# Altium PCB PCB2.PcbDoc
Units mm, origin at the board's own origin, x right, y up, seen from the top; angles counter-clockwise.
Board outline 37.72 x 66.93 mm, 2 copper layers (Top Layer, Bottom Layer); 28 components, 30 nets, 108 pads, 22 vias.
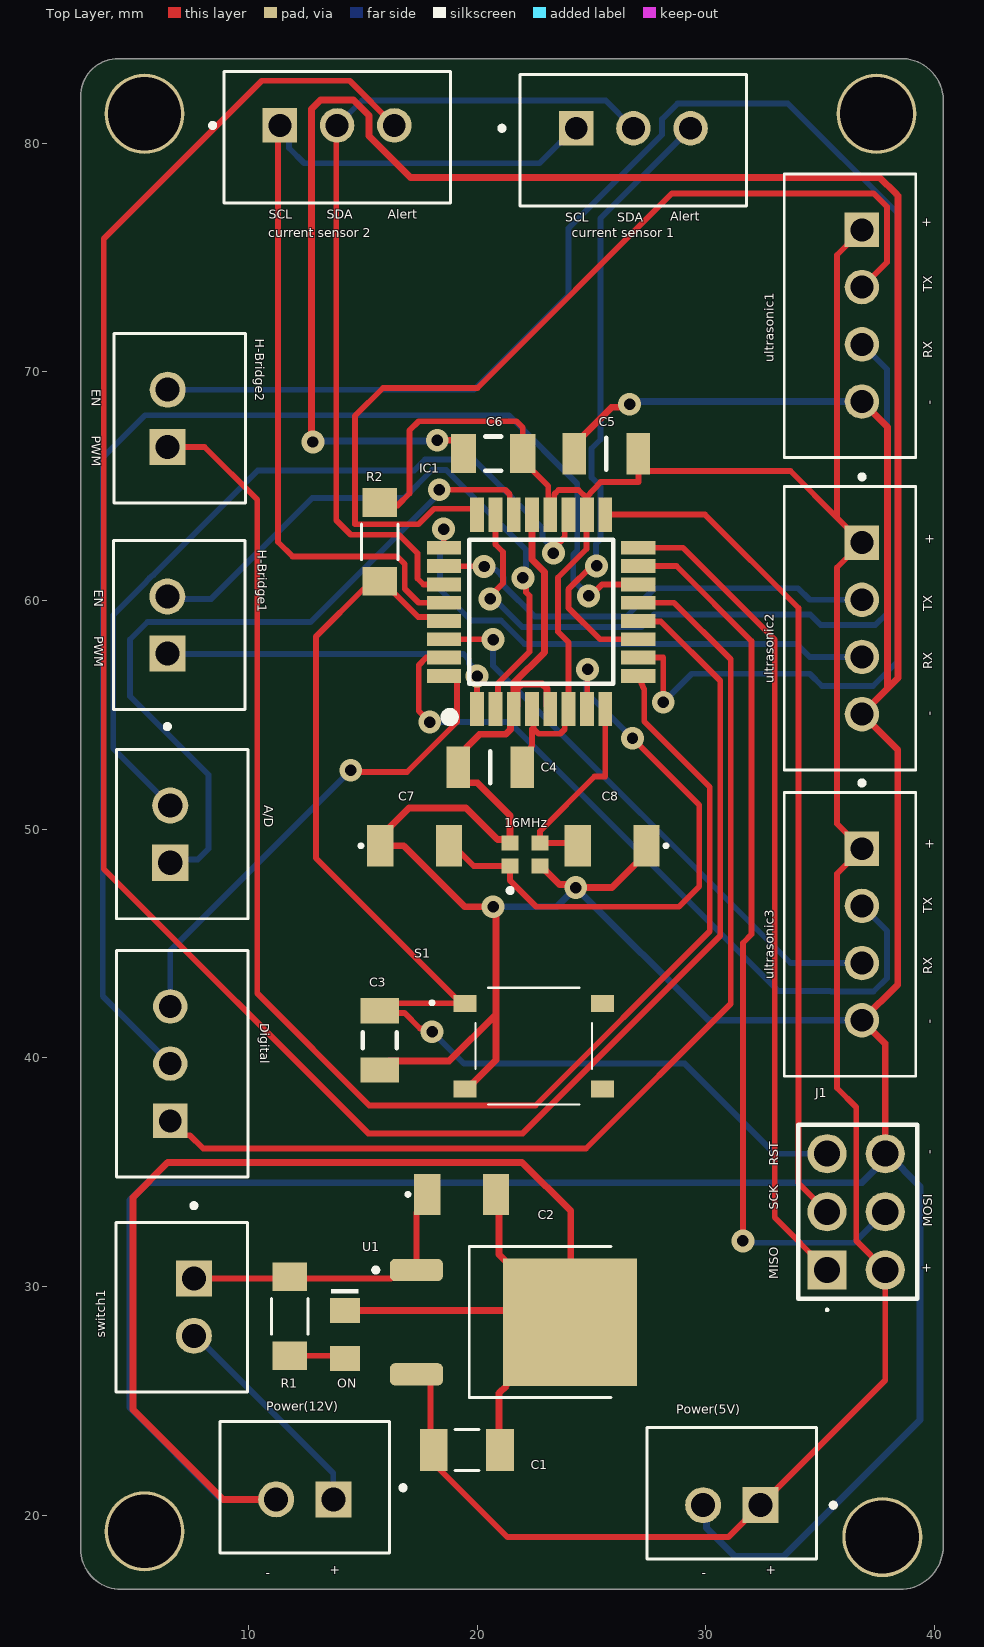
[diagram p0: Top Layer view]
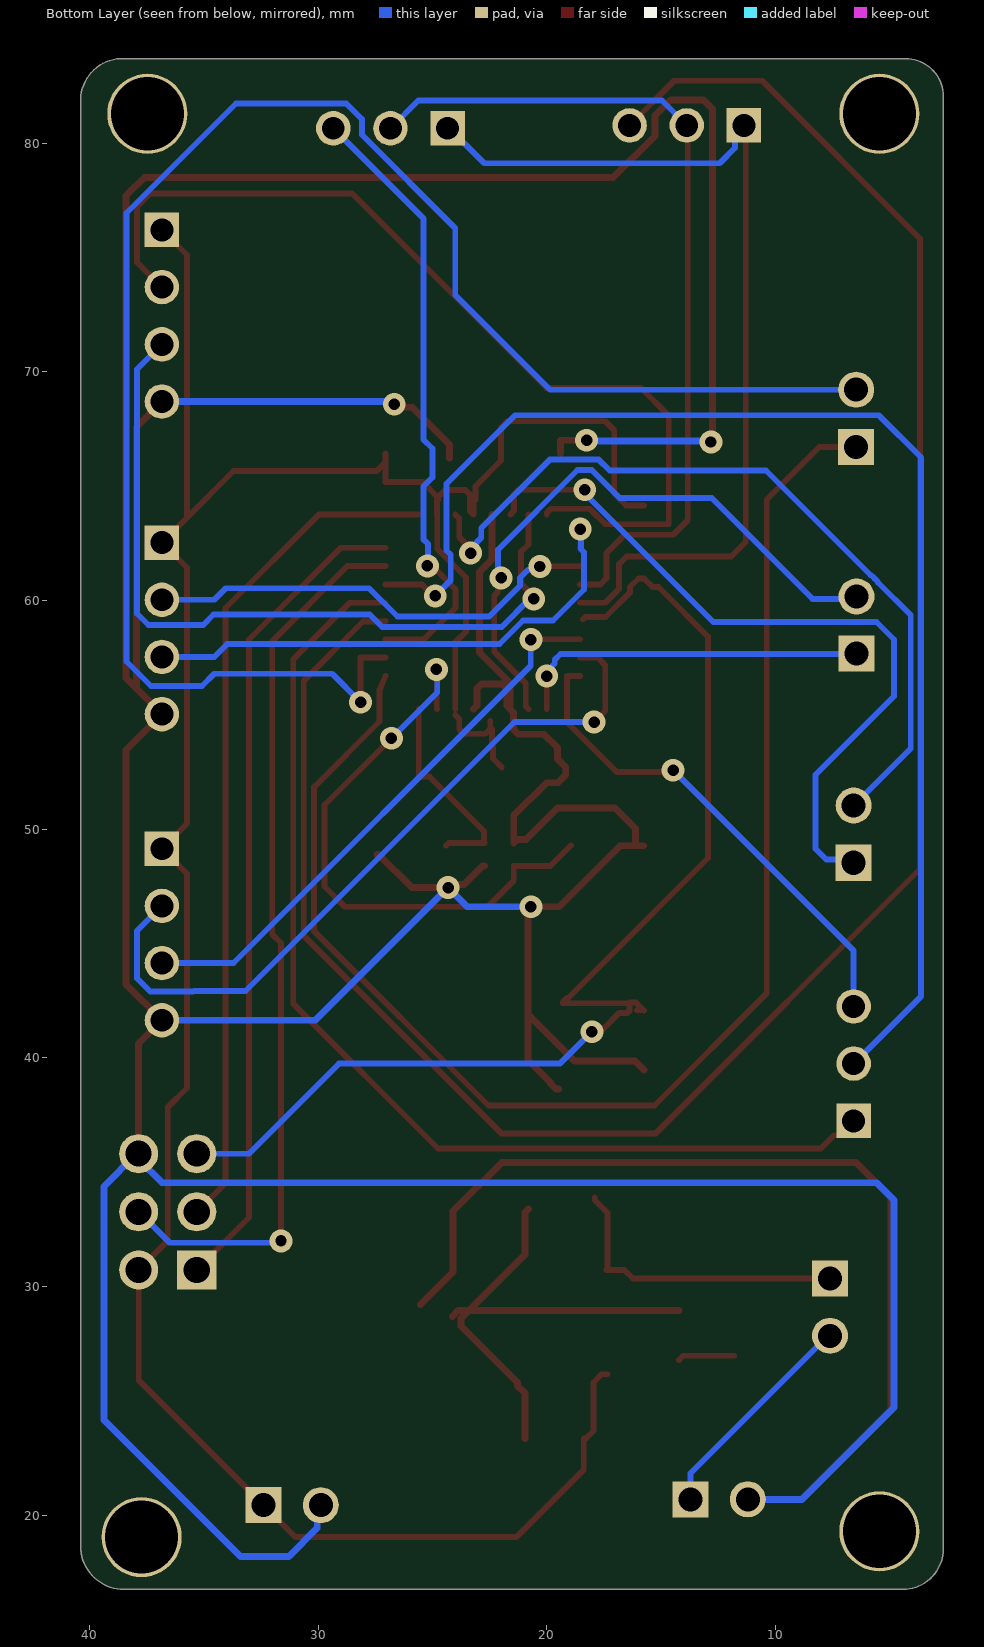
[diagram p1: Bottom Layer view, seen from below]
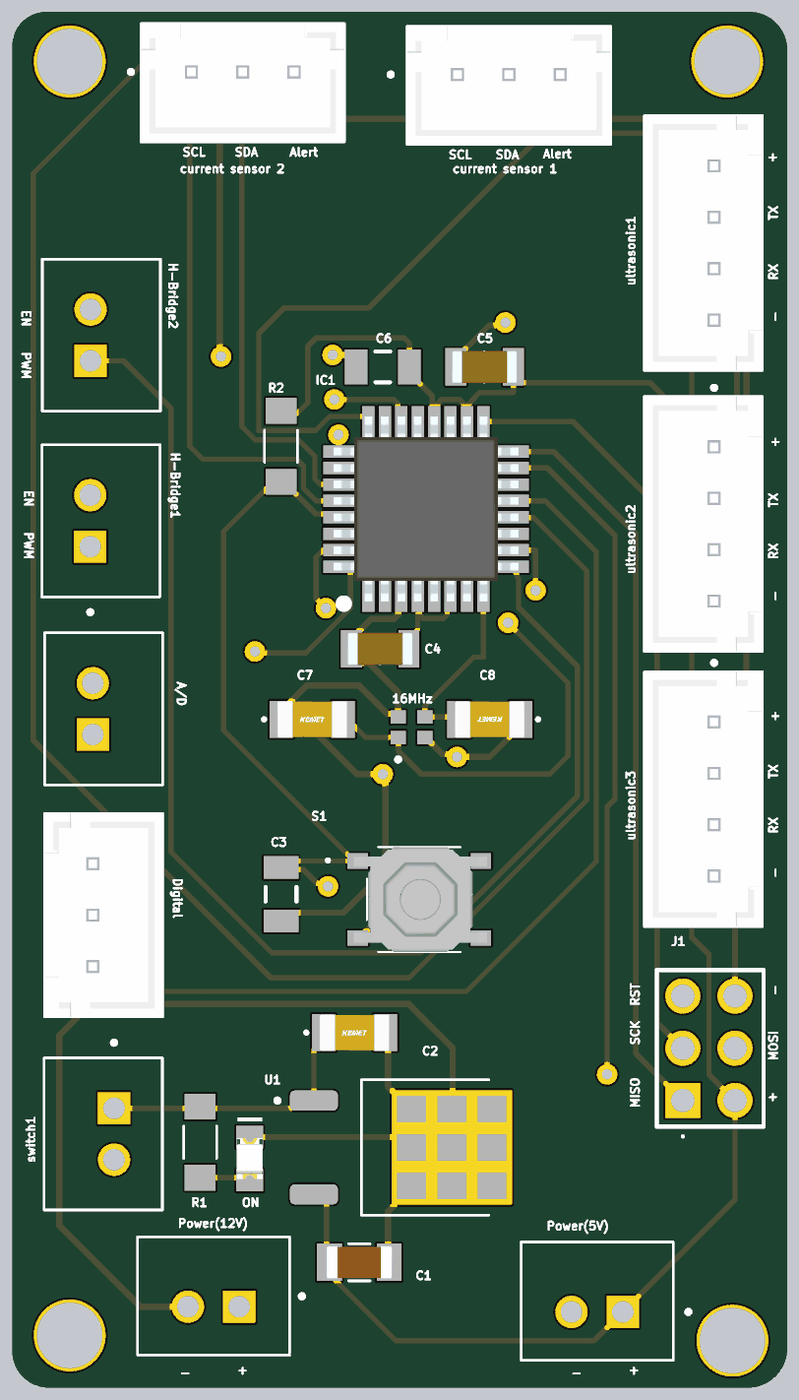
[diagram p2: 3D render of the assembled board from above, using the file's embedded part models]

## Layer stack, top to bottom
Top Solder: solder mask 0.0102, Solder Resist, Dk 3.5
Top Layer: signal copper 0.0356
Dielectric 1: dielectric 0.32, FR-4, Dk 4.8
Bottom Layer: signal copper 0.0356
Bottom Solder: solder mask 0.0102, Solder Resist, Dk 3.5

## Board outline
2.667,18.542 2.667,82.042 cw(c4.318,82.042) 4.318,83.693 38.481,83.693 cw(c38.544,81.851) 40.386,81.915 40.386,18.669 cw(c38.481,18.669) 38.481,16.764 4.445,16.764 cw(c4.445,18.542)

## Design rules (kind name [scope] priority, off if disabled: settings)
BoardOutlineClearance [All] p1: gap=0.2 ignorepadtopadclearanceinfootprint=FALSE except(0.4: Arc-SplitBarrior Arc-SplitContinuation Track-SplitBarrior Track-SplitContinuation SMDPad-SplitBarrior SMDPad-SplitContinuation THPad-SplitBarrior THPad-SplitContinuation Via-SplitBarrior Via-SplitContinuation Fill-SplitBarrior Fill-SplitContinuation Poly-SplitBarrior Poly-SplitContinuation Region-SplitBarrior Region-SplitContinuation Text-SplitBarrior Text-SplitContinuation)
Clearance "Clearance Bottom Layer" [OnLayer('Bottom Layer')] p1: gap=0.203 ignorepadtopadclearanceinfootprint=TRUE except(0.254: Arc-Text Track-Text SMDPad-Text THPad-Text Via-Text Fill-Text Poly-Text Region-Text Text-Text)
Clearance "Clearance Top Layer" [OnLayer('Top Layer')] p2: gap=0.203 ignorepadtopadclearanceinfootprint=TRUE except(0.254: Arc-Text Track-Text SMDPad-Text THPad-Text Via-Text Fill-Text Poly-Text Region-Text Text-Text)
Clearance [All] p3: gap=0.2 ignorepadtopadclearanceinfootprint=FALSE except(0.089: Arc-Arc Arc-Track Arc-SMDPad Track-Track Track-SMDPad SMDPad-SMDPad; 0.127: Arc-Via Track-Via SMDPad-Via THPad-Via Via-Via; 0.254: Arc-Text Track-Text SMDPad-Text THPad-Text Via-Text Fill-Text Poly-Text Region-Text Text-Text)
HoleSize [All] p1: absolutevalues=TRUE maxlimit=6.3 minlimit=0.2 maxpercent=80.000 minpercent=20.000
MinimumAnnularRing [All] p1: minimumring=0.076
MinimumSolderMaskSliver [All] p1: minsoldermaskwidth=0.1
PolygonConnect PolygonConnect_1 [All] p1: thpad.connectstyle=Relief thpad.reliefconductorwidth=0.508 thpad.reliefentries=4 thpad.polygonreliefangle="90 Angle" thpad.airgapwidth=0.254 smdpad.connectstyle=Relief smdpad.reliefconductorwidth=0.508 smdpad.reliefentries=4 smdpad.polygonreliefangle="90 Angle" smdpad.airgapwidth=0.254 via.connectstyle=Direct via.reliefconductorwidth=0.508 via.reliefentries=4 via.polygonreliefangle="90 Angle" via.airgapwidth=0.254
RoutingCorners [All] p1: cornerstyle=Round minsetback=2.54 maxsetback=2.54
RoutingVias [All] p1: holewidth=0.5 width=1 viastyle="Through Hole" minholewidth=0.2 minwidth=0.45 maxholewidth=1 maxwidth=2
SilkToSilkClearance [All] p1: silktosilkclearance=0.1
SilkToSolderMaskClearance [IsPad] p1: minsilkscreentomaskgap=0.1 clearancetoexposedcopper=TRUE
SolderMaskExpansion [All] p1: expansion=0.102 istentingtop=FALSE
Width [All] p1: maxlimit=2.54 minlimit=0.089 preferedwidth=0.381
25 further rules are at their usual default settings.

## Classes and differential pairs
component class Inputs: A/D "current sensor 1" "current sensor 2" Digital H-Bridge1 H-Bridge2 Power(5V) Power(12V) switch1 ultrasonic1 ultrasonic2 ultrasonic3
component class PowerSupply: C2 ON R1 U1
component class Main: 16MHz C3 C4 C5 C6 C7 C8 IC1 J1 R2 S1

## Components (designator, comment, footprint, x,y, rotation, side; value= is the part's Value field where it differs from the comment)
16MHz "ABM11-16.000MHz-12-N1G-T" XTAL_ABM11-16.000MHz-12-N1G-T 22.098,48.895 r90 top
A/D "B2B-XH-A" JST_B2B-XH-A 7.112,49.784 r270 top
C1 "GRM31C5C2A104JA01L" CAPC3216X180N 19.558,22.86 r0 top
C2 "C1206C334K1RECAUTO" C1206 19.328,34.036 r0 top
C3 "1206GC102KAT1A" AVX-1206-2_L 15.748,40.767 r90 top
C4 "10nF" CAPC3216X94N 20.574,52.705 r0 top
C5 "10nF" CAPC3216X94N 25.654,66.421 r0 top
C6 "1206GC102KAT1A" AVX-1206-2_L 20.701,66.421 r0 top
C7 "C1206C220JGGACTU (22pF)" C1206 17.272,49.276 r0 top
C8 "C1206C220JGGACTU (22pF)" C1206 25.908,49.276 r180 top
"current sensor 1" "B3B-XH-A(LF)(SN)" JST_B3B-XH-A(LF)(SN) 26.837,80.12 r180 top
"current sensor 2" "B3B-XH-A(LF)(SN)" JST_B3B-XH-A(LF)(SN) 13.883,80.247 r180 top
Digital "B3B-XH-A(LF)(SN)" JST_B3B-XH-A(LF)(SN) 7.112,39.751 r270 top
H-Bridge1 "B2B-XH-A" JST_B2B-XH-A 6.985,58.928 r270 top
H-Bridge2 "B2B-XH-A" JST_B2B-XH-A 7.002,67.965 r270 top
IC1 "ATMEGA328P-AU" QFP80P900X900X120-32N 22.803,59.504 r90 top
J1 "87911-0611" 879110611 35.306,30.734 r90 top
ON "150080SS75000" WL-SMCW_0805_150080xx75000 14.224,27.906 r270 top
Power(5V) "B2B-XH-A" JST_B2B-XH-A 31.135,20.972 r0 top (schematic designator Power(1)
Power(12V) "B2B-XH-A" JST_B2B-XH-A 12.466,21.226 r0 top (schematic designator Power1)
R1 "ERA8AEB103V" RES_ERA8AEB103V 11.811,28.702 r90 top
R2 "ERA8AEB103V" RES_ERA8AEB103V 15.748,62.56 r90 top
S1 "TS-1187A-B-A-B" TS1187ABAB 22.479,40.513 r0 top
switch1 "B2B-XH-A" JST_B2B-XH-A 7.095,29.103 r90 top
U1 "L78M05ACDT-TR" DPAK228P972X240-4N 21.59,28.448 r270 top
ultrasonic1 "B4B-XH-A(LF)(SN)" JST_B4B-XH-A(LF)(SN) 36.305,72.45 r90 top
ultrasonic2 "B4B-XH-A(LF)(SN)" JST_B4B-XH-A(LF)(SN) 36.305,58.781 r90 top
ultrasonic3 "B4B-XH-A(LF)(SN)" JST_B4B-XH-A(LF)(SN) 36.305,45.399 r90 top

## Footprints (in the part's own frame and the unit in brackets; to place one, negate y for a bottom-side part, rotate by r counter-clockwise, add the part's x,y. Pads: shape width x height; smd on the part's side, far side on the other; paste and mask are expansions set on the pad)
879110611 [mm]
  rect 1.71x1.71 hole 1.14: 1(0,0)
  round 1.71 hole 1.14: 2(0,-2.54) 3(2.54,0) 4(2.54,-2.54) 5(5.08,0) 6(5.08,-2.54)
  silkscreen extent -1.8,-3.94 6.35,1.27, body extent -1.4,-3.56 6.22,1.01, height 0.25
AVX-1206-2_L [mm] "SMD, 2-Leads, Body 3.4x1.8mm, IPC High Density"
  rect 1.1x1.7 smd: 1(-1.3,0) 2(1.3,0)
  silkscreen extent -0.35,-0.75 0.35,0.75, body extent -1.7,-0.9 1.7,0.9, height 1.52
C1206 [mm]
  rect 1.15x1.8 smd: 1(-1.5,0) 2(1.5,0)
  silkscreen extent -2.4,-0.05 -2.3,0.05, body extent -1.7,-0.9 1.7,0.9, height 1.1
CAPC3216X94N [mm]
  rect 1.02x1.82 smd: 1(-1.4,0) 2(1.4,0)
  silkscreen extent 0,-0.7 0,0.7, body extent -1.6,-0.8 1.6,0.8, height 0.94
CAPC3216X180N [mm]
  rect 1.21x1.82 smd: 1(-1.45,0) 2(1.45,0)
  silkscreen extent -0.52,-0.9 0.52,0.9, body extent -1.6,-0.8 1.6,0.8, height 1.9
DPAK228P972X240-4N [mm]
  rrect50% 0.98x2.33 smd: 1(-2.28,-4.24) 3(2.28,-4.24)
  rect 5.57x5.86 smd paste-4: 2(0,2.47)
  silkscreen extent -3.3,-6.12 3.3,4.27
JST_B2B-XH-A [mm]
  rect 1.575x1.575 / inner round 1.575 / far side rect 1.575x1.575 hole 1.05: 1(1.25,-0.525)
  round 1.575 hole 1.05: 2(-1.25,-0.525)
  silkscreen extent -3.7,-2.88 3.7,2.87
JST_B3B-XH-A(LF)(SN) [mm]
  rect 1.508x1.508 / inner round 1.508 / far side rect 1.508x1.508 hole 1: 1(2.5,-0.525)
  round 1.508 hole 1: 2(0,-0.525) 3(-2.5,-0.525)
  silkscreen extent -4.95,-2.88 5.85,2.87, body extent -4.95,-2.88 4.95,2.88, height 7
JST_B4B-XH-A(LF)(SN) [mm]
  rect 1.508x1.508 / inner round 1.508 / far side rect 1.508x1.508 hole 1: 1(3.75,-0.525)
  round 1.508 hole 1: 2(1.25,-0.525) 3(-1.25,-0.525) 4(-3.75,-0.525)
  silkscreen extent -6.2,-2.88 6.2,2.87, body extent -6.2,-2.88 6.2,2.88, height 7
QFP80P900X900X120-32N [mm]
  rect 1.5x0.6 smd: 1(-4.25,2.8) 2(-4.25,2) 3(-4.25,1.2) 4(-4.25,0.4) 5(-4.25,-0.4) 6(-4.25,-1.2) 7(-4.25,-2) 8(-4.25,-2.8) 17(4.25,-2.8) 18(4.25,-2) 19(4.25,-1.2) 20(4.25,-0.4) 21(4.25,0.4) 22(4.25,1.2) 23(4.25,2) 24(4.25,2.8)
  rect 0.6x1.5 smd: 9(-2.8,-4.25) 10(-2,-4.25) 11(-1.2,-4.25) 12(-0.4,-4.25) 13(0.4,-4.25) 14(1.2,-4.25) 15(2,-4.25) 16(2.8,-4.25) 25(2.8,4.25) 26(2,4.25) 27(1.2,4.25) 28(0.4,4.25) 29(-0.4,4.25) 30(-1.2,4.25) 31(-2,4.25) 32(-2.8,4.25)
  silkscreen extent -4.8,-3.15 3.15,4.2, body extent -4.5,-4.5 4.5,4.5, height 1.2
RES_ERA8AEB103V [mm]
  rect 1.25x1.5 smd: 1(-1.725,0) 2(1.725,0)
  silkscreen extent -0.78,-0.8 0.78,0.8
TS1187ABAB [mm]
  rect 1x0.75 smd: A1(-3,1.875) B1(3,1.875) C1(-3,-1.875) D1(3,-1.875)
  silkscreen extent -4.5,-2.55 2.55,2.55, body extent -3.2,-2.55 3.3,2.55, height 1.5
WL-SMCW_0805_150080xx75000 [mm] "SMD Mono-color Chip LED, body 2.0x1.25mm"
  rect 1.1x1.3 smd: 1(-1.05,0) 2(1.05,0)
  silkscreen extent -2,-0.6 -1.8,0.6, body extent -1,-0.63 1,0.62, height 0.7
XTAL_ABM11-16.000MHz-12-N1G-T [mm]
  rect 0.65x0.75 smd: 1(-0.5,0.65) 2(-0.5,-0.65) 3(0.5,-0.65) 4(0.5,0.65)
  silkscreen extent -1.67,0.55 -1.48,0.75

## Part data
16MHz A/D H-Bridge1 H-Bridge2 Power(5V) Power(12V) R1 R2 switch1: Package=None, Availability=Unavailable, Price=None
  16MHz: MF="{'manufacturer': u'Abracon LLC'}", MP=ABM11-16.000MHz-12-N1G-T
  A/D H-Bridge1 H-Bridge2 Power(5V) Power(12V) switch1: MF="{'manufacturer': u'JST Sales America Inc.'}", MP=B2B-XH-A
  R1 R2: MP=ERA8AEB103V
C1: "0.1 ÂµF Â±5% 100V Ceramic Capacitor C0G, NP0 1206 (3216 Metric)", Package="1206 Murata", Check_prices=https://www.snapeda.com/parts/GRM31C5C2A104JA01L/Murata+Electronics+North+America/view-part/?ref=eda, MF="Murata Electronics", MP=GRM31C5C2A104JA01L, SnapEDA_Link=https://www.snapeda.com/parts/GRM31C5C2A104JA01L/Murata+Electronics+North+America/view-part/?ref=snap
C2: "Capacitor", Manufacturer_Name=KEMET, Mouser Part Number=80-C1206C334K1RECAUT, Arrow Part Number=C1206C334K1RECAUTO, Arrow Price/Stock=https://www.arrow.com/en/products/c1206c334k1recauto/kemet-corporation, Datasheet Link=https://content.kemet.com/datasheets/KEM_C1090_X7R_ESD.pdf, Manufacturer_Part_Number=C1206C334K1RECAUTO, Mouser Price/Stock=https://www.mouser.co.uk/ProductDetail/KEMET/C1206C334K1RECAUTO?qs=MLItCLRbWsx8dVF2h1wzKg%3D%3D
C3 C6: library part CMP-2000-05468-1, "Chip Capacitor, 1 nF, +/- 10%, -55 to 125 degC, 1206 (3216 Metric), RoHS, Tape and Reel", Capacitance=100nF, Case Size/Dimension=1206, Dielectric=X7R, Manufacturer=AVX, Package Description="2-Pin SMD, Body 3.4 x 1.8 mm", Rated Voltage=2000V, Tolerance=10%, Tolerance (%)=±10%, Datasheet URL=https://datasheet.ciiva.com/11787/0900766b80ed4c37-11787781.pdf, Datasheet Version=11/2010, Manufacturer URL=http://www.avx.com/, Mounting Technology=SurfaceMount, Package Reference=1206, PartNumber=1206GC102KAT1A, Voltage Rating DC=2000V
C4 C5: library part KAM31BR81H103KT, "Capacitor", Manufacturer_Name="Kyocera AVX", Mouser Part Number=581-KAM31BR81H103KT, Datasheet Link=https://datasheets.kyocera-avx.com/AutoMLCCKAM.pdf, Height=0.94mm, Manufacturer_Part_Number=KAM31BR81H103KT, Mouser Price/Stock=https://www.mouser.co.uk/ProductDetail/KYOCERA-AVX/KAM31BR81H103KT?qs=Jm2GQyTW%2FbjzijSUJGW%2FJA%3D%3D
C7 C8: library part C1206C220JGGACTU, "Capacitor", Manufacturer_Name=KEMET, Mouser Part Number=80-C1206C220JGG, Datasheet Link=https://content.kemet.com/datasheets/KEM_C1009_C0G_HV_SMD.pdf, Manufacturer_Part_Number=C1206C220JGGACTU, Mouser Price/Stock=https://www.mouser.co.uk/ProductDetail/KEMET/C1206C220JGGACTU?qs=bISZhnDGhxtrVzrFMq60vg%3D%3D
"current sensor 1" "current sensor 2" Digital: "Connector Header Through Hole 3 position 0.098 (2.50mm)", Package=None, Check_prices=https://www.snapeda.com/parts/B3B-XH-A(LF)(SN)/JST+Sales+America+Inc./view-part/?ref=eda, MF="JST Sales", MP=B3B-XH-A(LF)(SN), SnapEDA_Link=https://www.snapeda.com/parts/B3B-XH-A(LF)(SN)/JST+Sales+America+Inc./view-part/?ref=snap
IC1: "Integrated Circuit", Manufacturer_Name=Microchip, Mouser Part Number=556-ATMEGA328P-AU, Arrow Part Number=ATMEGA328P-AU, Arrow Price/Stock=https://www.arrow.com/en/products/atmega328p-au/microchip-technology?region=europe, Datasheet Link=https://componentsearchengine.com/Datasheets/2/ATMEGA328P-AU.pdf, Height=1.2mm, Manufacturer_Part_Number=ATMEGA328P-AU, Mouser Price/Stock=https://www.mouser.co.uk/ProductDetail/Microchip-Technology/ATMEGA328P-AU?qs=K8BHR703ZXiCmmgp6%2FGNmQ%3D%3D
J1: "Connector", Manufacturer_Name=Molex, Mouser Part Number=538-87911-0611, Datasheet Link=https://www.molex.com/content/dam/molex/molex-dot-com/products/automated/en-us/salesdrawingpdf/879/87911/879110611_sd.pdf, Height=5.18mm, Manufacturer_Part_Number=87911-0611, Mouser Price/Stock=https://www.mouser.co.uk/ProductDetail/Molex/87911-0611?qs=vTUKd8r8%252BfEYOBWrgoJ4qQ%3D%3D
ON: library part CMP-1426-00010-3, Case Code (Imperial)=0805, Case Code (Metric)=2012, Color=Red, Forward Current=100mA, Forward Voltage=1.9V, Max Junction Temperature (Tj)=95°C, Max Operating Temperature=85°C, Max Reverse Voltage (DC)=5V, Min Operating Temperature=-40°C, Power Dissipation=72mW, Test Current=20mA, Case/Package=0805, Dominant Wavelength=630nm, Height=700µm, Length=2mm, Lens Style="Clear, Rectangular", Luminous Intensity=60mcd, Mount="Surface Mount", NexarPartId=29717782, Packaging="Tape and Reel", Peak Wavelength=645nm, REACH SVHC=Unknown, Reverse Voltage=5V, RoHS=Compliant, Viewing Angle=140°, Wavelength=630nm, Width=1.25mm
S1: "Switch", Manufacturer_Name="XKB Connectivity", Datasheet Link=http://www.helloxkb.com/public/images/pdf/TS-1187A-X-X-X.pdf, Height=4.05mm, Manufacturer_Part_Number=TS-1187A-B-A-B
U1: "Linear Voltage Regulator IC 1 Output 500mA DPAK", Package="TO-252-3 STMicroelectronics", Availability=Unavailable, MF=STMicroelectronics, MP=L78M05ACDT-TR, Price=None, SnapEDA_Link=https://www.snapeda.com/parts/L78M05ACDT-TR/STMicroelectronics/view-part/274303/?ref=snap
ultrasonic1 ultrasonic2 ultrasonic3: "Connector Header Through Hole 4 position 0.098 (2.50mm)", Package=None, Check_prices=https://www.snapeda.com/parts/B4B-XH-A(LF)(SN)/JST+Sales+America+Inc./view-part/?ref=eda, MF="JST Sales", MP=B4B-XH-A(LF)(SN), SnapEDA_Link=https://www.snapeda.com/parts/B4B-XH-A(LF)(SN)/JST+Sales+America+Inc./view-part/?ref=snap

## Free pads (board coordinates)
  round 3.5 hole 3.2: 7(5.461,19.304) 7(5.461,81.28) 7(37.465,81.28) 7(37.719,19.05)

## Via types
v1: diameter 1, hole 0.5, Top Layer to Bottom Layer, 22 vias

## Nets (pads, with @x,y where several pads share a name; then routed paths per layer and width w, separated by ;. In a path a pad name is that pad's centre, name@x,y a point inside that pad or via, vN(x,y) a via of type N, cw(c..) or ccw(c..) an arc to the next point about the centre after c; other vN are vias at no path point)
+5: C1.1 C4.2 C5.2 C6.2 IC1.4 IC1.6 IC1.18 IC1.20 J1.2 Power(5V).1 R2.2 U1.3 ultrasonic1.1 ultrasonic2.1 ultrasonic3.1 | length 125.8
  Top Layer w0.254: R2.2@15.748,64.16 16.535,64.16 17.052,64.677 17.052,67.439 17.448,67.835 21.73,67.835 22.001,67.564 C6.2 22.001,66.121 23.114,65.008 IC1.20@23.114,64.389 ; U1.3 17.608,26.168 17.962,25.814 17.962,23.694 C1.1@18.288,23.368 ; C1.1@18.385,23.368 18.385,22.001 21.336,19.05 30.988,19.05 32.385,20.447 ; C4.2 22.357,53.088 22.357,53.591 22.403,53.637 22.403,54.378 ; IC1.4@22.479,54.737 22.479,54.378 22.683,54.174 23.64,54.174 23.833,54.367 23.833,54.821 IC1.6@24.003,54.991 ; IC1.20@23.203,64.389 IC1.20 23.373,63.924 23.373,64.641 23.566,64.834 24.44,64.834 24.765,64.509 IC1.18@24.765,64.389 ; IC1.6 24.003,58.17 23.536,58.636 23.536,61.001 24.789,62.254 24.789,63.74 IC1.18 IC1.18@24.803,64.389 ; 24.803,64.516 25.4,65.176 27.054,65.176 C5.2@27.054,66.042 ; C5.2 C5.2@27.054,66.042 ; 32.405,20.464 37.846,25.905 J1.2 36.576,32.004 36.576,37.846 35.738,38.684 35.738,48.057 ultrasonic3.1 35.738,50.241 35.738,61.439 ultrasonic2.1 35.738,63.623 ; ultrasonic1.1 35.738,75.108 35.738,63.623 ; C5.2@27.054,66.042 27.437,65.659 33.702,65.659 35.738,63.623
GND: 16MHz.2 16MHz.4 C1.2 C2.2 C3.1 C4.1 C5.1 C6.1 C7.1 C8.1 IC1.3 IC1.5 IC1.21 J1.6 ON.1 Power(5V).2 Power(12V).2 S1.C1 U1.2 ultrasonic1.4 ultrasonic2.4 ultrasonic3.4 | length 336.6
  Top Layer w0.3: 11.216,20.701 8.89,20.701 4.953,24.638 4.953,33.909 6.477,35.433 21.971,35.433 24.1,33.304 24.1,30.637 U1.2@25.527,29.21 ; v1(12.827,66.929) 12.765,66.991 12.765,81.485 13.159,81.879 14.597,81.879 15.276,81.2 15.276,80.313 17.099,78.49 37.591,78.49 38.314,77.786 cw(c38.105,77.571) 38.317,77.784 38.405,77.696 38.405,56.606 37.948,56.149 ; ON.1 U1.2@23.407,28.956 ; C3.1 16.148,39.867 18.785,39.867 20.828,41.91 ; C7.1 C7.1@16.129,49.276 ; v1(18.263,67.005) 19.401,67.005 C6.1 ; S1.C1 19.604,38.638 19.829,38.863 19.829,38.909 20.828,39.908 20.828,41.91 ; C2.2@20.804,33.401 20.955,33.25 20.955,31.408 U1.2@23.407,28.956 ; C1.2@20.955,23.368 20.955,25.343 21.28,25.668 21.28,25.813 23.749,28.282 23.749,28.614 U1.2@23.407,28.956 ; IC1.21 22.403,61.797 22.951,61.248 22.951,57.737 21.603,56.389 IC1.3 ; 16MHz.2@22.733,48.387 22.806,48.387 23.612,47.581 24.182,47.581 v1(24.316,47.447) 25.904,47.447 27.352,48.895 C8.1@27.432,48.895 ; IC1.5 23.056,55.401 23.056,56.15 22.849,56.357 21.957,56.357 21.75,56.15 21.75,55.401 IC1.3 ; U1.2@24.13,28.702 23.876,28.956 U1.2@23.407,28.956 ; C5.1@24.254,66.218 C5.1 24.254,66.821 25.879,68.446 26.536,68.446 v1(26.67,68.58) ; ultrasonic1.4 37.948,67.582 37.948,56.149 ; J1.6 37.846,40.633 ultrasonic3.4 38.394,43.213 38.394,53.467 ultrasonic2.4 37.948,56.149 ; C7.1@16.129,49.276 16.798,49.276 19.465,46.609 v1(20.701,46.609) 20.828,46.482 20.828,41.91 ; C7.1@16.129,49.276 16.129,50.038 17.018,50.927 19.524,50.927 19.7,50.751 20.905,49.546 21.297,49.546 16MHz.4 21.448,50.597 20.016,52.029 19.534,52.029 19.174,52.389 C4.1 19.534,53.065 19.534,53.57 20.115,54.151 21.249,54.151 21.456,54.358 21.456,55.107 IC1.3
  Bottom Layer w0.3: 11.216,20.701 8.838,20.701 4.826,24.713 4.826,33.782 5.588,34.544 36.83,34.544 37.846,35.56 J1.6 ; v1(12.827,66.929) 12.865,66.967 18.224,66.967 v1(18.263,67.005) ; v1(20.701,46.609) 23.478,46.609 24.257,47.388 v1@24.257,47.498 ; v1(24.316,47.447) 30.114,41.649 36.823,41.649 ultrasonic3.4@36.83,41.656 ; v1(26.67,68.58) 26.79,68.7 36.823,68.7 ultrasonic1.4@36.83,68.707 ; 29.885,20.447 30.04,20.292 30.04,19.452 31.282,18.209 33.401,18.209 39.37,24.178 39.37,34.385 J1.6@37.941,35.814
MISO: IC1.16 J1.1 | length 36.1
  Top Layer w0.254: IC1.16 29.009,62.304 33.02,58.293 33.02,33.02 J1.1
MOSI: IC1.15 J1.4 | length 39.5
  Top Layer w0.254: IC1.15 28.724,61.504 32.004,58.224 32.004,45.405 31.623,45.024 v1(31.623,32.004)
  Bottom Layer w0.254: v1(31.623,32.004) 31.708,31.919 36.491,31.919 J1.4
Net16MHz_1: 16MHz.1 C7.2 IC1.7 | length 25.9
  Top Layer w0.254: C7.2@18.948,49.3 19.853,48.395 16MHz.1 21.448,47.752 22.586,46.614 28.834,46.614 29.718,47.498 29.718,51.054 v1(26.797,53.975) ; IC1.7 24.818,55.269 24.818,56.97 v1(24.833,56.985)
  Bottom Layer w0.254: v1(24.833,56.985) 24.79,56.942 24.79,55.982 v1(26.797,53.975)
Net16MHz_3: 16MHz.3 C8.2 IC1.8 | length 9
  Top Layer w0.254: 16MHz.3@22.733,49.403 22.741,49.395 16MHz.3 ; C8.2 24.289,49.395 16MHz.3 ; IC1.8 25.603,52.3 25.137,52.3 22.748,49.911 16MHz.3
NetA/D_1: A/D.1 IC1.22 | length 32.9
  Top Layer w0.254: v1(18.346,64.839) 21.235,64.839 21.433,64.641 21.433,63.924 IC1.22
  Bottom Layer w0.254: A/D.1@6.604,48.514 6.771,48.681 7.787,48.681 8.255,49.149 8.255,52.384 4.826,55.813 4.826,58.293 5.588,59.055 12.725,59.055 18.346,64.675 v1(18.346,64.839)
NetA/D_2: A/D.2 IC1.19 | length 35.4
  Top Layer w0.254: v1(23.336,62.071) 23.336,62.272 23.833,62.77 23.833,63.584 IC1.19
  Bottom Layer w0.254: A/D.2 4.093,53.528 4.093,59.363 5.519,60.789 5.581,60.868 cw(c6.46,60.178) 5.77,61.057 5.849,61.119 10.414,65.684 17.255,65.684 17.729,66.159 19.871,66.159 22.865,63.165 22.865,62.743 23.336,62.272 v1(23.336,62.071)
NetC2_1: C2.1 R1.2 switch1.1 U1.1 | length 13.3
  Top Layer w0.254: switch1.1 11.43,30.353 12.827,30.353 16.236,30.353 16.617,30.734 U1.1@17.35,30.734 ; U1.1 U1.1@17.35,30.734 ; U1.1@17.399,30.734 U1.1@17.35,30.734 ; C2.1@17.907,33.909 17.907,33.79 17.35,33.233 U1.1@17.35,30.734
"Netcurrent sensor 1_1": "current sensor 1.1" "current sensor 2.1" IC1.28 | length 41.6
  Top Layer w0.254: 11.303,80.772 11.303,62.56 11.938,61.925 16.51,61.925 16.84,61.595 16.84,60.514 17.451,59.904 IC1.28
  Bottom Layer w0.254: 11.43,80.645 11.781,80.294 11.781,79.786 12.446,79.121 22.733,79.121 23.63,80.018 23.71,80.018 24.257,80.565 24.257,80.645
"Netcurrent sensor 1_2": "current sensor 1.2" "current sensor 2.2" IC1.27 | length 37.7
  Top Layer w0.254: 13.843,80.772 13.843,63.508 14.478,62.873 16.59,62.873 17.399,62.064 17.399,60.96 17.655,60.704 IC1.27
  Bottom Layer w0.254: 13.883,80.772 14.967,81.856 25.626,81.856 26.797,80.685 26.797,80.645
"Netcurrent sensor 1_3": "current sensor 1.3" IC1.11 | length 27.4
  Top Layer w0.254: v1(25.225,61.516) 25.023,61.516 23.994,60.486 23.994,59.682 25.372,58.304 IC1.11
  Bottom Layer w0.254: v1(25.225,61.516) 25.199,61.542 25.199,62.476 25.4,62.677 25.4,64.985 25.002,65.384 25.002,66.646 25.4,67.044 25.4,76.708 29.21,80.518 29.464,80.518
"Netcurrent sensor 2_3": "current sensor 2.3" IC1.12 | length 95.1
  Top Layer w0.254: 16.383,80.772 14.434,82.721 10.585,82.721 3.683,75.819 3.683,48.26 15.24,36.703 21.996,36.703 30.632,45.339 30.632,56.49 28.035,59.087 27.07,59.087 IC1.12
NetDigital_1: Digital.1 IC1.13 | length 47.7
  Top Layer w0.254: Digital.1@6.604,37.234 7.214,36.624 7.445,36.624 8.029,36.04 24.763,36.04 31.09,42.367 31.09,57.429 28.615,59.904 IC1.13
NetDigital_2: Digital.2 IC1.14 | length 58.1
  Top Layer w0.254: v1(24.881,60.2) 24.969,60.2 25.474,60.705 27.052,60.705 IC1.14
  Bottom Layer w0.254: Digital.2 3.636,42.702 3.636,66.247 5.486,68.097 21.395,68.097 24.384,65.108 24.384,62.191 24.205,62.013 24.205,60.884 24.881,60.209 v1(24.881,60.2)
NetDigital_3: Digital.3 IC1.32 | length 21.9
  Top Layer w0.254: v1(14.478,52.578) 14.554,52.502 16.942,52.502 19.126,54.686 19.126,56.704 IC1.32
  Bottom Layer w0.254: Digital.3@6.604,42.164 6.587,42.181 6.587,44.687 v1(14.478,52.578)
NetH-Bridge1_1: H-Bridge1.1 IC1.1 | length 15.7
  Top Layer w0.254: IC1.1 20.005,55.256 20.005,56.694 v1(20.006,56.696)
  Bottom Layer w0.254: H-Bridge1.1@6.35,57.658 19.408,57.658 19.655,57.411 19.655,57.248 20.006,56.897 v1(20.006,56.696)
NetH-Bridge1_2: H-Bridge1.2 IC1.2 | length 27.3
  Top Layer w0.254: IC1.2 20.92,55.371 20.92,56.385 22.297,57.762 22.297,60.206 22.145,60.358 22.145,60.848 v1(22.002,60.991)
  Bottom Layer w0.254: H-Bridge1.2@6.477,60.198 6.604,60.071 8.382,60.071 12.794,64.483 16.815,64.483 18.034,65.702 18.657,65.702 22.137,62.222 22.137,61.126 v1(22.002,60.991)
NetH-Bridge2_1: H-Bridge2.1 IC1.9 | length 63.8
  Top Layer w0.254: H-Bridge2.1 8.088,66.715 10.389,64.414 10.389,42.824 15.291,37.922 22.555,37.922 30.175,45.542 30.175,51.847 27.313,54.709 27.313,56.099 IC1.9
NetH-Bridge2_2: H-Bridge2.2 IC1.10 | length 75.3
  Top Layer w0.254: IC1.10 28.143,57.504 v1(28.143,55.55)
  Bottom Layer w0.254: H-Bridge2.2 19.863,69.215 24.003,73.355 24.003,76.278 28.087,80.362 28.087,81.046 28.77,81.729 33.587,81.729 38.379,76.937 38.379,57.328 37.313,56.261 35.077,56.261 34.544,56.794 29.388,56.794 v1(28.143,55.55)
NetIC1_23: IC1.23 ultrasonic1.3 | length 34.8
  Top Layer w0.254: v1(20.574,60.071) 20.574,60.191 21.137,60.754 21.137,62.116 20.803,62.45 IC1.23
  Bottom Layer w0.254: v1(20.574,60.071) 20.744,60.071 21.974,58.841 27.197,58.841 27.741,59.385 34.569,59.385 35.027,58.928 37.414,58.928 37.922,59.436 37.922,70.108 ultrasonic1.3
NetIC1_24: IC1.24 ultrasonic1.2 | length 42
  Top Layer w0.254: IC1.24 20.003,63.836 19.83,64.009 18.119,64.009 17.44,63.33 14.668,63.33 14.668,68.072 15.887,69.291 20.015,69.291 28.524,77.8 37.338,77.8 37.922,77.216 37.922,74.792 ultrasonic1.2
NetIC1_25: IC1.25 ultrasonic2.3 | length 23.3
  Top Layer w0.254: v1(18.542,63.119) 18.542,62.315 IC1.25
  Bottom Layer w0.254: v1(18.542,63.119) 18.507,63.084 18.507,62.238 18.38,62.111 18.38,60.477 19.735,59.123 21.045,59.123 22.071,58.097 33.978,58.097 34.544,57.531 36.703,57.531 ultrasonic2.3@36.83,57.658 ; ultrasonic2.3@36.772,57.589 ultrasonic2.3
NetIC1_26: IC1.26 ultrasonic2.2 | length 20.2
  Top Layer w0.254: IC1.26 18.562,61.495 20.298,61.495 v1(20.307,61.486)
  Bottom Layer w0.254: v1(20.307,61.486) 20.45,61.343 20.826,61.343 21.172,60.997 21.172,60.647 22.521,59.298 26.532,59.298 27.773,60.539 34.036,60.539 34.544,60.031 36.743,60.031 ultrasonic2.2@36.83,59.944
NetIC1_30: IC1.30 ultrasonic3.3 | length 24.8
  Top Layer w0.254: IC1.30 20.69,58.304 v1(20.701,58.293)
  Bottom Layer w0.254: v1(20.701,58.293) 20.701,57.15 33.702,44.149 36.75,44.149 ultrasonic3.3@36.83,44.069
NetIC1_31: IC1.31 ultrasonic3.2 | length 32.6
  Top Layer w0.254: v1(17.932,54.686) 17.45,55.169 17.45,57.174 17.78,57.504 IC1.31
  Bottom Layer w0.254: v1(17.932,54.686) 21.412,54.686 33.172,42.926 35.433,42.926 ; 35.484,42.901 37.338,42.901 37.922,43.485 37.922,45.557 ultrasonic3.2
NetON_2: ON.2 R1.1 | length 2.5
  Top Layer w0.254: R1.1 14.044,26.977 ON.2@14.224,26.797
NetPower(12V)_1: Power(12V).1 switch1.2 | length 9.6
  Bottom Layer w0.254: switch1.2@7.747,27.813 13.716,21.844 13.716,20.701
RESET: C3.2 IC1.29 J1.5 R2.1 S1.A1 | length 52
  Top Layer w0.254: C3.2@16.053,42.086 C3.2 16.099,42.418 16.383,42.418 C3.2@16.383,42.388 ; v1(18.034,41.148) 17.891,41.291 17.51,41.291 16.83,41.971 16.471,41.971 16.383,42.059 C3.2@16.383,42.388 ; IC1.29@18.415,59.182 18.323,59.274 17.434,59.274 16.371,60.337 16.371,60.587 15.998,60.96 15.748,60.96 15.375,60.587 15.121,60.587 12.954,58.42 12.954,48.738 17.623,44.069 19.056,42.636 19.106,42.636 19.304,42.438 19.304,42.388 C3.2@16.383,42.388
  Bottom Layer w0.254: v1(18.034,41.148) 19.431,39.751 29.083,39.751 33.02,35.814 J1.5
SCK: IC1.17 J1.3 | length 37.1
  Top Layer w0.254: IC1.17 29.972,63.754 34.053,59.673 34.053,34.527 J1.3
pads on no net: S1.B1 S1.D1

## Silkscreen, mask and mechanical layers (free items; w line width, h text height)
Top Overlay:
  text "SCL" at 10.895,76.681 h0.4
  text "SDA" at 13.435,76.681 h0.4
  text "Alert" at 16.102,76.681 h0.4
  text "Alert" at 28.439,76.594 h0.4
  text "SCL" at 23.849,76.554 h0.4
  text "SDA" at 26.135,76.554 h0.4
  text "+" at 39.845,76.3 h0.4 r90
  text "TX" at 39.905,73.506 h0.4 r90
  text "RX" at 39.905,70.585 h0.4 r90
  text "EN" at 3.148,69.242 h0.4 r270
  text "-" at 39.978,68.553 h0.4 r90
  text "PWM" at 3.148,67.21 h0.4 r270
  text "+" at 39.972,62.457 h0.4 r90
  text "EN" at 3.275,60.479 h0.4 r270
  text "TX" at 39.905,59.536 h0.4 r90
  text "PWM" at 3.275,58.447 h0.4 r270
  text "RX" at 39.905,56.996 h0.4 r90
  text "-" at 39.978,54.964 h0.4 r90
  text "+" at 39.972,49.122 h0.4 r90
  text "TX" at 39.905,46.328 h0.4 r90
  text "RX" at 39.905,43.661 h0.4 r90
  text "-" at 39.978,41.502 h0.4 r90
  text "-" at 39.978,35.787 h0.4 r90
  text "RST" at 33.174,35.279 h0.4 r90
  text "SCK" at 33.174,33.374 h0.4 r90
  text "MOSI" at 39.905,32.612 h0.4 r90
  text "+" at 39.845,30.58 h0.4 r90
  text "MISO" at 33.174,30.326 h0.4 r90
  text "+" at 13.562,17.432 h0.4
  text "+" at 32.612,17.432 h0.4
  text "-" at 10.768,17.299 h0.4
  text "-" at 29.818,17.299 h0.4
Mechanical 1:
  lines w0.254: 40.386,81.788 40.386,81.661 40.386,18.669 cw(c38.481,18.669) 38.481,16.764 4.445,16.764 cw(c4.445,18.542) 2.667,18.542 2.667,82.042 cw(c4.318,82.042) 4.318,83.693 38.481,83.693 cw(c38.544,81.852) 40.386,81.915